# Altium PCB BusinessCard.PcbDoc
Units mil, origin at the board's own origin, x right, y up, seen from the top; angles counter-clockwise.
Board outline 3543.31 x 2165.35 mil, 2 copper layers (Top Layer, Bottom Layer); 19 components, 0 nets, 314 pads, 0 vias.
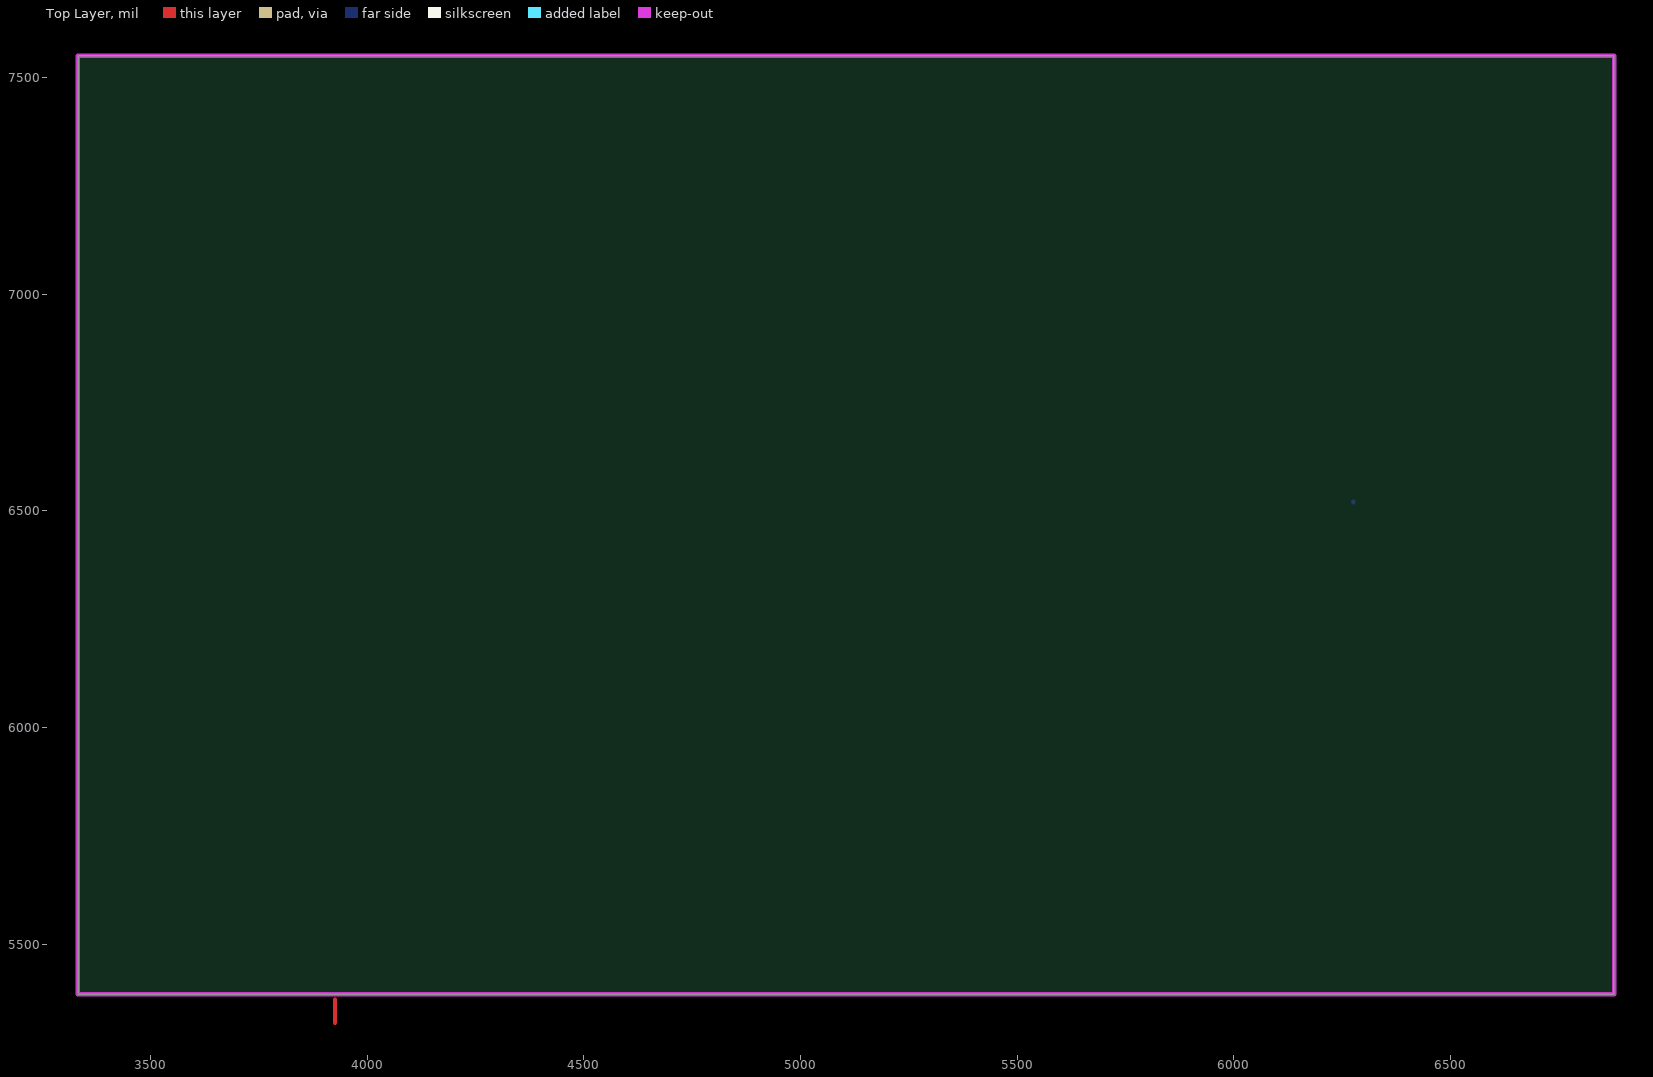
[diagram p0: Top Layer view]
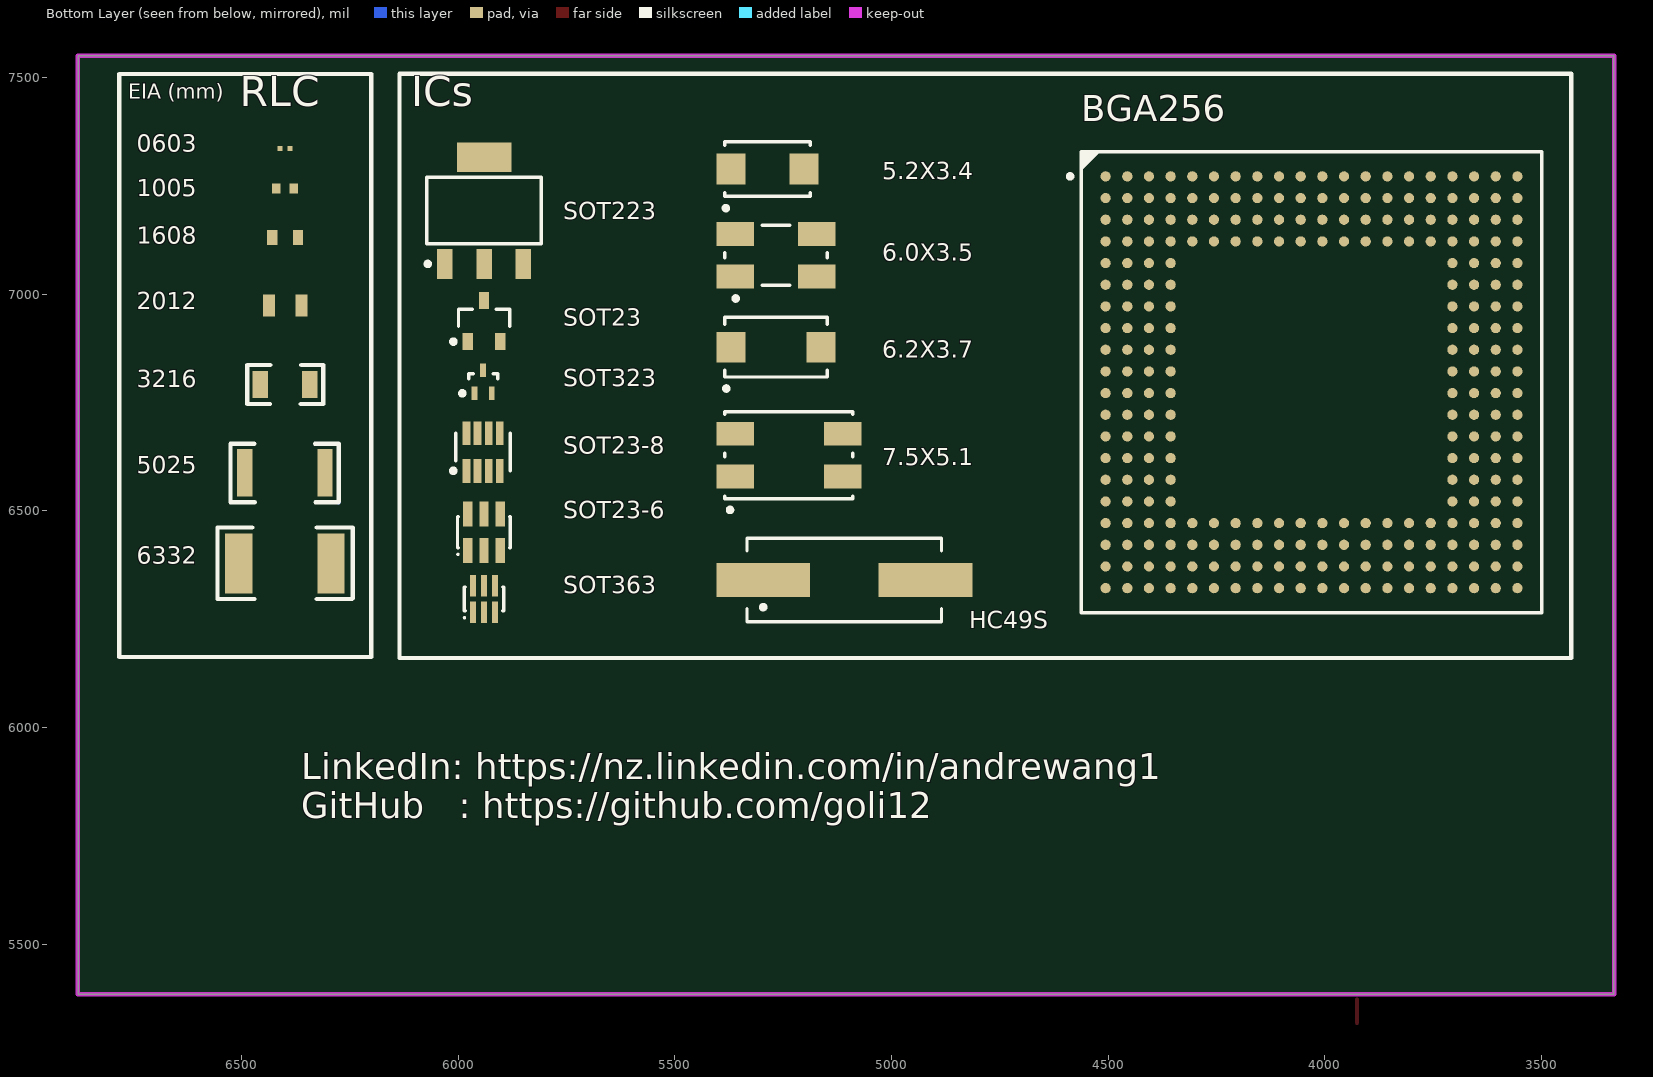
[diagram p1: Bottom Layer view, seen from below]

## Layer stack, top to bottom
Top Solder: solder mask 0.4, Solder Resist, Dk 3.5
Top Layer: signal copper 1.4
Dielectric 1: dielectric 12.6, FR-4, Dk 4.8
Bottom Layer: signal copper 1.4
Bottom Solder: solder mask 0.4, Solder Resist, Dk 3.5

## Board outline
3333.35,7550.35 3333.35,5385 6876.65,5385 6876.65,7550.35

## Design rules (kind name [scope] priority, off if disabled: settings)
Clearance [All] p1: gap=10
PolygonConnect [All] p1: connectstyle=Relief reliefconductorwidth=10 reliefentries=4 polygonreliefangle="90 Angle" airgapwidth=10
RoutingVias [All] p1: holewidth=28 width=50 viastyle="Through Hole" minholewidth=28 minwidth=50 maxholewidth=28 maxwidth=50
SolderMaskExpansion [All] p1: expansion=4
Width [All] p1: maxlimit=10 minlimit=10 preferedwidth=10
30 further rules are at their usual default settings.

## Components (designator, comment, footprint, x,y, rotation, side; value= is the part's Value field where it differs from the comment)
5.2X3.4 "Comment" 4SMX 5286.17,7289 r180 bottom
6.0X3.5 "Comment" 2SMX-3SMXB 5266.48,7090 r180 bottom
6.2X3.7 "Comment" 3SMXA 5266.48,6878 r180 bottom
7.5X5.1 "Comment" 12SMXB-14SMX 5236.95,6629 r180 bottom
0603 "Comment" 0603_metric 6411,7336 r180 bottom
1005 "Comment" 1005_metric 6399.31,7244 r180 bottom
1608 "Comment" 1608_metric 6399,7131 r180 bottom
2012 "Comment" 2012_metric 6398.6,6974 r180 bottom
3216 "Comment" 3216_metric 6398.91,6792 r180 bottom
5025 "Comment" 5025_metric 6399.52,6588 r180 bottom
6332 "Comment" 6332_metric 6399.52,6379 r180 bottom
BGA256 "Comment" BGA256T 4031,6797 r180 bottom
HC49S "Comment" HC49/4H_SMX 5109,6341 r180 bottom
SOT23 "Comment" SOT95P245X110-3N 5940,6938 r90 bottom
SOT23-6 "Comment" SOT23-6 5940.22,6451 r180 bottom
SOT23-8 "Comment" SOT23-8 5942.19,6636 r180 bottom
SOT223 "Comment" SOT230P700X180-4N 5940,7193 r90 bottom
SOT323 "Comment" SOTFL50P160X73-3N 5942,6798 r90 bottom
SOT363 "Comment" SOT-363 5940,6297 r180 bottom

## Footprints (in the part's own frame and the unit in brackets; to place one, negate y for a bottom-side part, rotate by r counter-clockwise, add the part's x,y. Pads: shape width x height; smd on the part's side, far side on the other; paste and mask are expansions set on the pad)
2SMX-3SMXB [mm] "Quartz Crystal, SM; Body 6.0 x 3.5 mm (LxW)"
  rect 2.2x1.4 smd: 1(-2.4,-1.25) 2(2.4,-1.25) 3(2.4,1.25) 4(-2.4,1.25)
  silkscreen extent -3,-2.66 3,1.75
3SMXA [mm] "Quartz Crystal, SM; Body 6.2 x 3.7 mm (LxW max)"
  rect 1.7x1.8 smd: 1(-2.65,0) 2(2.65,0)
  silkscreen extent -3.04,-2.55 3,1.75
4SMX [mm] "Quartz Crystal, SM; Body 5.2 x 3.4 mm (LxW max)"
  rect 1.7x1.8 smd: 1(-2.15,0) 2(2.15,0)
  silkscreen extent -2.57,-2.42 2.5,1.6
12SMXB-14SMX [mm] "Quartz Crystal, SM; Body 7.5 x 5.1 mm (LxW max)"
  rect 2.2x1.4 smd: 1(-3.15,-1.25) 2(-3.15,1.25) 3(3.15,1.25) 4(3.15,-1.25)
  silkscreen extent -3.75,-3.34 3.75,2.55
0603_metric [mm]
  rect 0.3x0.3 smd: 1(0,0) 2(0.6,0)
1005_metric [mm]
  rect 0.5x0.6 smd: 1(-0.5,0) 2(0.5,0)
1608_metric [mm]
  rect 0.6x0.9 smd: 1(-0.75,0) 2(0.75,0)
2012_metric [mm]
  rect 0.7x1.3 smd: 1(-0.95,0) 2(0.95,0)
3216_metric [mm]
  rect 0.9x1.6 smd: 1(-1.45,0) 2(1.45,0)
5025_metric [mm]
  rect 0.9x2.8 smd: 1(-2.35,0) 2(2.35,0)
6332_metric [mm]
  rect 1.6x3.5 smd: 1(-2.7,0) 2(2.7,0)
BGA256T [mm] "256-Ball Ball Grid Array (BGA256) - Option 1"
  round 0.6 smd: A1(-12.065,12.065) A2(-10.795,12.065) A3(-9.525,12.065) A4(-8.255,12.065) A5(-6.985,12.065) A6(-5.715,12.065) A7(-4.445,12.065) A8(-3.175,12.065) A9(-1.905,12.065) A10(-0.635,12.065) A11(0.635,12.065) A12(1.905,12.065) A13(3.175,12.065) A14(4.445,12.065) A15(5.715,12.065) A16(6.985,12.065) A17(8.255,12.065) A18(9.525,12.065) A19(10.795,12.065) A20(12.065,12.065) B1(-12.065,10.795) B2(-10.795,10.795) B3(-9.525,10.795) B4(-8.255,10.795) B5(-6.985,10.795) B6(-5.715,10.795) B7(-4.445,10.795) B8(-3.175,10.795) B9(-1.905,10.795) B10(-0.635,10.795) B11(0.635,10.795) B12(1.905,10.795) B13(3.175,10.795) B14(4.445,10.795) B15(5.715,10.795) B16(6.985,10.795) B17(8.255,10.795) B18(9.525,10.795) B19(10.795,10.795) B20(12.065,10.795) C1(-12.065,9.525) C2(-10.795,9.525) C3(-9.525,9.525) C4(-8.255,9.525) C5(-6.985,9.525) C6(-5.715,9.525) C7(-4.445,9.525) C8(-3.175,9.525) C9(-1.905,9.525) C10(-0.635,9.525) C11(0.635,9.525) C12(1.905,9.525) C13(3.175,9.525) C14(4.445,9.525) C15(5.715,9.525) C16(6.985,9.525) C17(8.255,9.525) C18(9.525,9.525) C19(10.795,9.525) C20(12.065,9.525) D1(-12.065,8.255) D2(-10.795,8.255) D3(-9.525,8.255) D4(-8.255,8.255) D5(-6.985,8.255) D6(-5.715,8.255) D7(-4.445,8.255) D8(-3.175,8.255) D9(-1.905,8.255) D10(-0.635,8.255) D11(0.635,8.255) D12(1.905,8.255) D13(3.175,8.255) D14(4.445,8.255) D15(5.715,8.255) D16(6.985,8.255) D17(8.255,8.255) D18(9.525,8.255) D19(10.795,8.255) D20(12.065,8.255) E1(-12.065,6.985) E2(-10.795,6.985) E3(-9.525,6.985) E4(-8.255,6.985) E17(8.255,6.985) E18(9.525,6.985) E19(10.795,6.985) E20(12.065,6.985) F1(-12.065,5.715) F2(-10.795,5.715) F3(-9.525,5.715) F4(-8.255,5.715) F17(8.255,5.715) F18(9.525,5.715) F19(10.795,5.715) F20(12.065,5.715) G1(-12.065,4.445) G2(-10.795,4.445) G3(-9.525,4.445) G4(-8.255,4.445) G17(8.255,4.445) G18(9.525,4.445) G19(10.795,4.445) G20(12.065,4.445) H1(-12.065,3.175) H2(-10.795,3.175) H3(-9.525,3.175) H4(-8.255,3.175) H17(8.255,3.175) H18(9.525,3.175) H19(10.795,3.175) H20(12.065,3.175) J1(-12.065,1.905) J2(-10.795,1.905) J3(-9.525,1.905) J4(-8.255,1.905) J17(8.255,1.905) J18(9.525,1.905) J19(10.795,1.905) J20(12.065,1.905) K1(-12.065,0.635) K2(-10.795,0.635) K3(-9.525,0.635) K4(-8.255,0.635) K17(8.255,0.635) K18(9.525,0.635) K19(10.795,0.635) K20(12.065,0.635) L1(-12.065,-0.635) L2(-10.795,-0.635) L3(-9.525,-0.635) L4(-8.255,-0.635) L17(8.255,-0.635) L18(9.525,-0.635) L19(10.795,-0.635) L20(12.065,-0.635) M1(-12.065,-1.905) M2(-10.795,-1.905) M3(-9.525,-1.905) M4(-8.255,-1.905) M17(8.255,-1.905) M18(9.525,-1.905) M19(10.795,-1.905) M20(12.065,-1.905) N1(-12.065,-3.175) N2(-10.795,-3.175) N3(-9.525,-3.175) N4(-8.255,-3.175) N17(8.255,-3.175) N18(9.525,-3.175) N19(10.795,-3.175) N20(12.065,-3.175) P1(-12.065,-4.445) P2(-10.795,-4.445) P3(-9.525,-4.445) P4(-8.255,-4.445) P17(8.255,-4.445) P18(9.525,-4.445) P19(10.795,-4.445) P20(12.065,-4.445) R1(-12.065,-5.715) R2(-10.795,-5.715) R3(-9.525,-5.715) R4(-8.255,-5.715) R17(8.255,-5.715) R18(9.525,-5.715) R19(10.795,-5.715) R20(12.065,-5.715) T1(-12.065,-6.985) T2(-10.795,-6.985) T3(-9.525,-6.985) T4(-8.255,-6.985) T17(8.255,-6.985) T18(9.525,-6.985) T19(10.795,-6.985) T20(12.065,-6.985) U1(-12.065,-8.255) U2(-10.795,-8.255) U3(-9.525,-8.255) U4(-8.255,-8.255) U5(-6.985,-8.255) U6(-5.715,-8.255) U7(-4.445,-8.255) U8(-3.175,-8.255) U9(-1.905,-8.255) U10(-0.635,-8.255) U11(0.635,-8.255) U12(1.905,-8.255) U13(3.175,-8.255) U14(4.445,-8.255) U15(5.715,-8.255) U16(6.985,-8.255) U17(8.255,-8.255) U18(9.525,-8.255) U19(10.795,-8.255) U20(12.065,-8.255) V1(-12.065,-9.525) V2(-10.795,-9.525) V3(-9.525,-9.525) V4(-8.255,-9.525) V5(-6.985,-9.525) V6(-5.715,-9.525) V7(-4.445,-9.525) V8(-3.175,-9.525) V9(-1.905,-9.525) V10(-0.635,-9.525) V11(0.635,-9.525) V12(1.905,-9.525) V13(3.175,-9.525) V14(4.445,-9.525) V15(5.715,-9.525) V16(6.985,-9.525) V17(8.255,-9.525) V18(9.525,-9.525) V19(10.795,-9.525) V20(12.065,-9.525) W1(-12.065,-10.795) W2(-10.795,-10.795) W3(-9.525,-10.795) W4(-8.255,-10.795) W5(-6.985,-10.795) W6(-5.715,-10.795) W7(-4.445,-10.795) W8(-3.175,-10.795) W9(-1.905,-10.795) W10(-0.635,-10.795) W11(0.635,-10.795) W12(1.905,-10.795) W13(3.175,-10.795) W14(4.445,-10.795) W15(5.715,-10.795) W16(6.985,-10.795) W17(8.255,-10.795) W18(9.525,-10.795) W19(10.795,-10.795) W20(12.065,-10.795) Y1(-12.065,-12.065) Y2(-10.795,-12.065) Y3(-9.525,-12.065) Y4(-8.255,-12.065) Y5(-6.985,-12.065) Y6(-5.715,-12.065) Y7(-4.445,-12.065) Y8(-3.175,-12.065) Y9(-1.905,-12.065) Y10(-0.635,-12.065) Y11(0.635,-12.065) Y12(1.905,-12.065) Y13(3.175,-12.065) Y14(4.445,-12.065) Y15(5.715,-12.065) Y16(6.985,-12.065) Y17(8.255,-12.065) Y18(9.525,-12.065) Y19(10.795,-12.065) Y20(12.065,-12.065)
  silkscreen extent -14.28,-13.5 13.5,13.5, body extent -13.5,-13.5 13.5,13.5, height 1.7
HC49/4H_SMX [mm] "Quartz Crystal, SM; Body 13.4 (inc. leads) x 4.9 mm (LxW max)"
  rect 5.5x2 smd: 1(-4.75,0) 2(4.75,0)
  silkscreen extent -5.7,-2.45 5.7,2.45
SOT23-6 [mm] "SOT-457/SC-74; 6 Leads; Body 3 x 3 mm, inc. leads (LxW max)"
  rect 0.55x1.45 smd: 1(-0.95,-1.075) 2(0,-1.075) 3(0.95,-1.075) 4(0.95,1.075) 5(0,1.075) 6(-0.95,1.075)
  silkscreen extent -1.58,-1.35 1.55,0.9
SOT23-8 [mm] "SSOP; 8 Leads; Body Width 1.6 mm; Pitch 0.65 mm"
  rect 0.45x1.4 smd: 1(-0.975,-1.1) 2(-0.325,-1.1) 3(0.325,-1.1) 4(0.975,-1.1) 5(0.975,1.1) 6(0.325,1.1) 7(-0.325,1.1) 8(-0.975,1.1)
  silkscreen extent -1.88,-1.22 1.6,1.1
SOT95P245X110-3N [mm] "SOT23, 3-Leads, Body 2.90x2.45mm, Pitch 0.95mm, IPC Medium Density"
  rect 1x0.6 smd: 1(-1.2,0.95) 2(-1.2,-0.95) 3(1.2,0)
  silkscreen extent -1.32,-1.5 0.7,1.93, body extent -0.7,-1.5 0.7,1.5, height 1.1
SOT230P700X180-4N [mm] "SOT223, 4-Leads, Body 6.50x7.00mm (avg), Pitch 2.30mm, IPC Medium Density"
  rect 1.75x0.9 smd: 1(-3.125,2.3) 2(-3.125,0) 3(-3.125,-2.3)
  rect 1.75x3.2 smd: 4(3.125,0)
  silkscreen extent -3.25,-3.35 1.95,3.43, body extent -1.85,-3.35 1.85,3.35, height 1.8
SOT-363 [mm] "SOT-363/SC-88; 6 Leads; Body 2.2 x 2.2 mm, inc. leads (LxW max)"
  rect 0.35x1.25 smd: 1(-0.65,-0.775) 2(0,-0.775) 3(0.65,-0.775) 4(0.65,0.775) 5(0,0.775) 6(-0.65,0.775)
  silkscreen extent -1.2,-1.15 1.15,0.7
SOTFL50P160X73-3N [mm] "SOTFL, 3-Leads, Body 1.60x1.60mm, Pitch 0.50mm, IPC Medium Density"
  rect 0.8x0.35 smd: 1(-0.675,0.5) 2(-0.675,-0.5) 3(0.675,0)
  silkscreen extent -0.8,-0.85 0.47,1.35, body extent -0.47,-0.83 0.47,0.82, height 0.73

## Nets (pads, with @x,y where several pads share a name; then routed paths per layer and width w, separated by ;. In a path a pad name is that pad's centre, name@x,y a point inside that pad or via, vN(x,y) a via of type N, cw(c..) or ccw(c..) an arc to the next point about the centre after c; other vN are vias at no path point)
pads on no net: 5.2X3.4.1 5.2X3.4.2 6.0X3.5.1 6.0X3.5.2 6.0X3.5.3 6.0X3.5.4 6.2X3.7.1 6.2X3.7.2 7.5X5.1.1 7.5X5.1.2 7.5X5.1.3 7.5X5.1.4 0603.1 0603.2 1005.1 1005.2 1608.1 1608.2 2012.1 2012.2 3216.1 3216.2 5025.1 5025.2 6332.1 6332.2 BGA256.A1 BGA256.A2 BGA256.A3 BGA256.A4 BGA256.A5 BGA256.A6 BGA256.A7 BGA256.A8 BGA256.A9 BGA256.A10 BGA256.A11 BGA256.A12 BGA256.A13 BGA256.A14 BGA256.A15 BGA256.A16 BGA256.A17 BGA256.A18 BGA256.A19 BGA256.A20 BGA256.B1 BGA256.B2 BGA256.B3 BGA256.B4 BGA256.B5 BGA256.B6 BGA256.B7 BGA256.B8 BGA256.B9 BGA256.B10 BGA256.B11 BGA256.B12 BGA256.B13 BGA256.B14 BGA256.B15 BGA256.B16 BGA256.B17 BGA256.B18 BGA256.B19 BGA256.B20 BGA256.C1 BGA256.C2 BGA256.C3 BGA256.C4 BGA256.C5 BGA256.C6 BGA256.C7 BGA256.C8 BGA256.C9 BGA256.C10 BGA256.C11 BGA256.C12 BGA256.C13 BGA256.C14 BGA256.C15 BGA256.C16 BGA256.C17 BGA256.C18 BGA256.C19 BGA256.C20 BGA256.D1 BGA256.D2 BGA256.D3 BGA256.D4 BGA256.D5 BGA256.D6 BGA256.D7 BGA256.D8 BGA256.D9 BGA256.D10 BGA256.D11 BGA256.D12 BGA256.D13 BGA256.D14 BGA256.D15 BGA256.D16 BGA256.D17 BGA256.D18 BGA256.D19 BGA256.D20 BGA256.E1 BGA256.E2 BGA256.E3 BGA256.E4 BGA256.E17 BGA256.E18 BGA256.E19 BGA256.E20 BGA256.F1 BGA256.F2 BGA256.F3 BGA256.F4 BGA256.F17 BGA256.F18 BGA256.F19 BGA256.F20 BGA256.G1 BGA256.G2 BGA256.G3 BGA256.G4 BGA256.G17 BGA256.G18 BGA256.G19 BGA256.G20 BGA256.H1 BGA256.H2 BGA256.H3 BGA256.H4 BGA256.H17 BGA256.H18 BGA256.H19 BGA256.H20 BGA256.J1 BGA256.J2 BGA256.J3 BGA256.J4 BGA256.J17 BGA256.J18 BGA256.J19 BGA256.J20 BGA256.K1 BGA256.K2 BGA256.K3 BGA256.K4 BGA256.K17 BGA256.K18 BGA256.K19 BGA256.K20 BGA256.L1 BGA256.L2 BGA256.L3 BGA256.L4 BGA256.L17 BGA256.L18 BGA256.L19 BGA256.L20 BGA256.M1 BGA256.M2 BGA256.M3 BGA256.M4 BGA256.M17 BGA256.M18 BGA256.M19 BGA256.M20 BGA256.N1 BGA256.N2 BGA256.N3 BGA256.N4 BGA256.N17 BGA256.N18 BGA256.N19 BGA256.N20 BGA256.P1 BGA256.P2 BGA256.P3 BGA256.P4 BGA256.P17 BGA256.P18 BGA256.P19 BGA256.P20 BGA256.R1 BGA256.R2 BGA256.R3 BGA256.R4 BGA256.R17 BGA256.R18 BGA256.R19 BGA256.R20 BGA256.T1 BGA256.T2 BGA256.T3 BGA256.T4 BGA256.T17 BGA256.T18 BGA256.T19 BGA256.T20 BGA256.U1 BGA256.U2 BGA256.U3 BGA256.U4 BGA256.U5 BGA256.U6 BGA256.U7 BGA256.U8 BGA256.U9 BGA256.U10 BGA256.U11 BGA256.U12 BGA256.U13 BGA256.U14 BGA256.U15 BGA256.U16 BGA256.U17 BGA256.U18 BGA256.U19 BGA256.U20 BGA256.V1 BGA256.V2 BGA256.V3 BGA256.V4 BGA256.V5 BGA256.V6 BGA256.V7 BGA256.V8 BGA256.V9 BGA256.V10 BGA256.V11 BGA256.V12 BGA256.V13 BGA256.V14 BGA256.V15 BGA256.V16 BGA256.V17 BGA256.V18 BGA256.V19 BGA256.V20 BGA256.W1 BGA256.W2 BGA256.W3 BGA256.W4 BGA256.W5 BGA256.W6 BGA256.W7 BGA256.W8 BGA256.W9 BGA256.W10 BGA256.W11 BGA256.W12 BGA256.W13 BGA256.W14 BGA256.W15 BGA256.W16 BGA256.W17 BGA256.W18 BGA256.W19 BGA256.W20 BGA256.Y1 BGA256.Y2 BGA256.Y3 BGA256.Y4 BGA256.Y5 BGA256.Y6 BGA256.Y7 BGA256.Y8 BGA256.Y9 BGA256.Y10 BGA256.Y11 BGA256.Y12 BGA256.Y13 BGA256.Y14 BGA256.Y15 BGA256.Y16 BGA256.Y17 BGA256.Y18 BGA256.Y19 BGA256.Y20 HC49S.1 HC49S.2 SOT23-6.1 SOT23-6.2 SOT23-6.3 SOT23-6.4 SOT23-6.5 SOT23-6.6 SOT23-8.1 SOT23-8.2 SOT23-8.3 SOT23-8.4 SOT23-8.5 SOT23-8.6 SOT23-8.7 SOT23-8.8 SOT23.1 SOT23.2 SOT23.3 SOT223.1 SOT223.2 SOT223.3 SOT223.4 SOT323.1 SOT323.2 SOT323.3 SOT363.1 SOT363.2 SOT363.3 SOT363.4 SOT363.5 SOT363.6
copper on no net: | length 55.4
  Top Layer w10: 3926.18,5319.03 3926.18,5373.03
  Bottom Layer w10: 6275,6521 6276,6520

## Keep-outs
Keep-Out Layer:
  lines w10: 3332.5,5385 3332.5,7550 6877.5,7550 6877.5,5385 3332.5,5385

## Silkscreen, mask and mechanical layers (free items; w line width, h text height)
Bottom Overlay:
  lines w10: 6242.82,6299 6242.82,6461 ; 6243.82,6462 6325.82,6462 ; 6244.82,6297 6325.82,6297 ; 6275,6521 6275,6655 6330,6655 ; 6276,6520 6329,6520 ; 6362,6837 6311,6837 6311,6747 6363,6747 ; 6433,6837 6486,6837 6486,6747 6434,6747 ; 6469,6520 6525,6520 6525,6655 6470,6655 ; 6469.82,6297 6554.82,6297 6554.82,6462 6474.82,6462 ; 3432,6161 3432,7509 6135,7509 6135,6161 3432,6161 ; 6200,6163 6200,7508 6782,7508 6782,6163 6200,6163
  text "EIA (mm)" at 6761,7439 h59.06
  text "ICs" at 6108,7411 h118.11
  text "RLC" at 6504,7411 h118.11
  text "LinkedIn: https://nz.linkedin.com/in/andrewang1 / GitHub   : https://github.com/goli12" at 6362.2,5791.33 h60
Top Solder:
  text "Andrew Ang" at 4232,6505 h393.7
  text "B.E (Hons.) Electronics/Electrical and Computer Systems" at 3529,6079 h157.48
  text "andrewang321@gmail.com" at 4377,5940.3 h157.48
  text "+6421 070 5328" at 4651,5779 h157.48
Bottom Solder:
  lines w10: 3530.69,5386 3530.69,5602 ; 3568.9,5386.94 3568.9,5440.94 ; 3608.27,5386.94 3608.27,5440.94 ; 3647.64,5386.94 3647.64,5440.94 ; 3687.01,5386.94 3687.01,5440.94 ; 3727,5386.03 3727,5494.03 ; 3765.75,5386.94 3765.75,5440.94 ; 3805.12,5386.94 3805.12,5440.94 ; 3844.49,5386.94 3844.49,5440.94 ; 3883.86,5386.94 3883.86,5440.94 ; 3924.39,5386 3924.39,5602 ; 3962.6,5385.96 3962.6,5439.96 ; 4001.97,5385.96 4001.97,5439.96 ; 4041.34,5385.96 4041.34,5439.96 ; 4080.71,5385.96 4080.71,5439.96 ; 4120.7,5386.03 4120.7,5494.03 ; 4159.45,5385.96 4159.45,5439.96 ; 4198.82,5385.96 4198.82,5439.96 ; 4238.19,5385.96 4238.19,5439.96 ; 4277.56,5385.96 4277.56,5439.96 ; 4318.09,5386 4318.09,5602 ; 4356.3,5385.96 4356.3,5439.96 ; 4395.67,5385.96 4395.67,5439.96 ; 4435.04,5385.96 4435.04,5439.96 ; 4474.41,5385.96 4474.41,5439.96 ; 4514.4,5386.03 4514.4,5494.03 ; 4553.15,5385.96 4553.15,5439.96 ; 4592.52,5385.96 4592.52,5439.96 ; 4631.89,5385.96 4631.89,5439.96 ; 4671.26,5385.96 4671.26,5439.96 ; 4711.79,5386 4711.79,5602 ; 4750,5385.96 4750,5439.96 ; 4789.37,5385.96 4789.37,5439.96 ; 4828.74,5385.96 4828.74,5439.96 ; 4868.11,5385.96 4868.11,5439.96 ; 4908.1,5386.03 4908.1,5494.03 ; 4946.85,5385.96 4946.85,5439.96 ; 4986.22,5385.96 4986.22,5439.96 ; 5025.59,5385.96 5025.59,5439.96 ; 5064.96,5385.96 5064.96,5439.96 ; 5105.49,5386 5105.49,5602 ; 5143.7,5385.96 5143.7,5439.96 ; 5183.07,5385.96 5183.07,5439.96 ; 5222.44,5385.96 5222.44,5439.96 ; 5261.81,5385.96 5261.81,5439.96 ; 5301.8,5386.03 5301.8,5494.03 ; 5340.55,5385.96 5340.55,5439.96 ; 5379.92,5385.96 5379.92,5439.96 ; 5419.29,5385.96 5419.29,5439.96 ; 5458.66,5385.96 5458.66,5439.96 ; 5499.2,5386 5499.2,5602 ; 5537.4,5384.98 5537.4,5438.98 ; 5576.77,5384.98 5576.77,5438.98 ; 5616.14,5384.98 5616.14,5438.98 ; 5655.51,5384.98 5655.51,5438.98 ; 5695.5,5385.05 5695.5,5493.05 ; 5734.25,5384.98 5734.25,5438.98 ; 5773.62,5384.98 5773.62,5438.98 ; 5812.99,5384.98 5812.99,5438.98 ; 5852.36,5384.98 5852.36,5438.98 ; 5892.9,5385.02 5892.9,5601.02 ; 5931.1,5384.98 5931.1,5438.98 ; 5970.47,5384.98 5970.47,5438.98 ; 6009.84,5384.98 6009.84,5438.98 ; 6049.21,5384.98 6049.21,5438.98 ; 6089.21,5385.05 6089.21,5493.05 ; 6127.95,5384.98 6127.95,5438.98 ; 6167.32,5384.98 6167.32,5438.98 ; 6206.69,5384.98 6206.69,5438.98 ; 6246.06,5384.98 6246.06,5438.98 ; 6286.6,5385.02 6286.6,5601.02 ; 6324.8,5385.96 6324.8,5439.96 ; 6364.17,5385.96 6364.17,5439.96 ; 6403.54,5385.96 6403.54,5439.96 ; 6442.91,5385.96 6442.91,5439.96 ; 6482.91,5386.03 6482.91,5494.03 ; 6521.65,5385.96 6521.65,5439.96 ; 6561.02,5385.96 6561.02,5439.96 ; 6600.39,5385.96 6600.39,5439.96 ; 6639.76,5385.96 6639.76,5439.96 ; 6680.3,5386 6680.3,5602 ; 6876.61,5386.03 6876.61,5494.03
  text "8" at 3601.38,5543.31 h60
  text "7" at 3914.38,5530.51 h60
  text "6" at 4308.08,5530.51 h60
  text "5" at 4701.78,5530.51 h60
  text "4" at 5095.48,5530.51 h60
  text "3" at 5489.18,5530.51 h60
  text "2" at 5882.88,5530.51 h60
  text "1" at 6276.58,5530.51 h60
  text "CM" at 6670.28,5530.51 h60

## Dimensions
6877.5,5385 to 5559,5707 on Top Layer
3332.5,5385 to 4651,5779 on Top Layer
6877.5,5385 to 5833,6113 on Top Layer
3332.5,5385 to 4377,6206 on Top Layer
6877.5,7550 to 6681,6569 on Top Layer
3332.5,7550 to 3529,6576 on Top Layer
5979,7056 to 6877.5,7550 on Top Layer
3332.5,7550 to 4231,7045 on Top Layer
3530.69,5602 to 3332.5,5385 on Top Layer
6680.3,5602 to 6877.5,5385 on Top Layer
3530.69,5386 to 3568.9,5439.96 on Top Layer